# Altium PCB cree_mobicom.PcbDoc
Units mil, origin at the board's own origin, x right, y up, seen from the top; angles counter-clockwise.
Board outline 2400 x 2400 mil, 2 copper layers (Top Layer, Bottom Layer); 23 components, 18 nets, 73 pads, 51 vias.
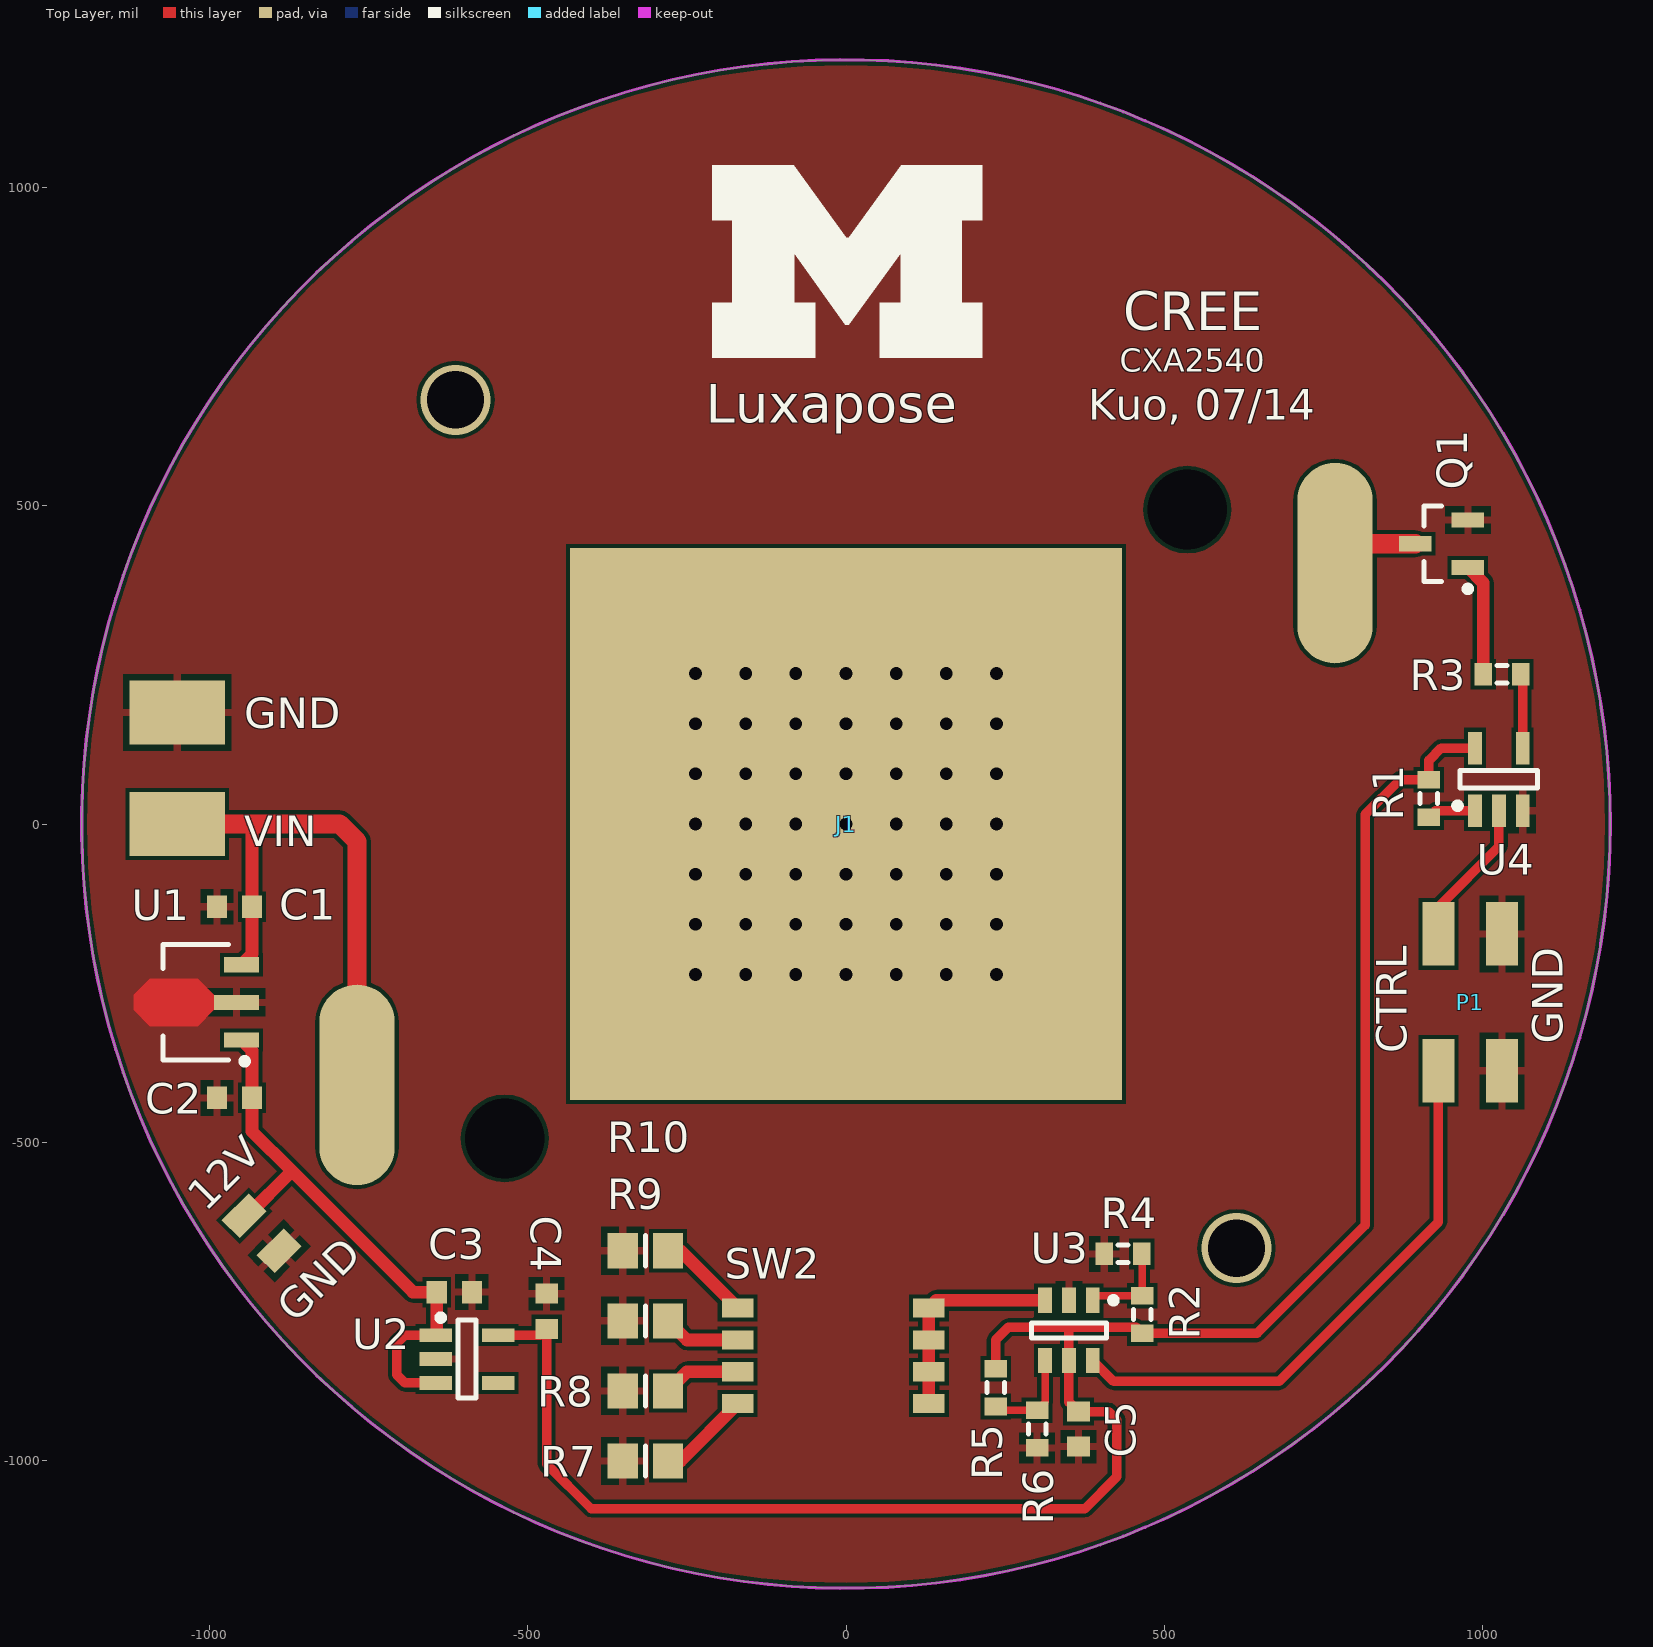
[diagram p0: Top Layer view]
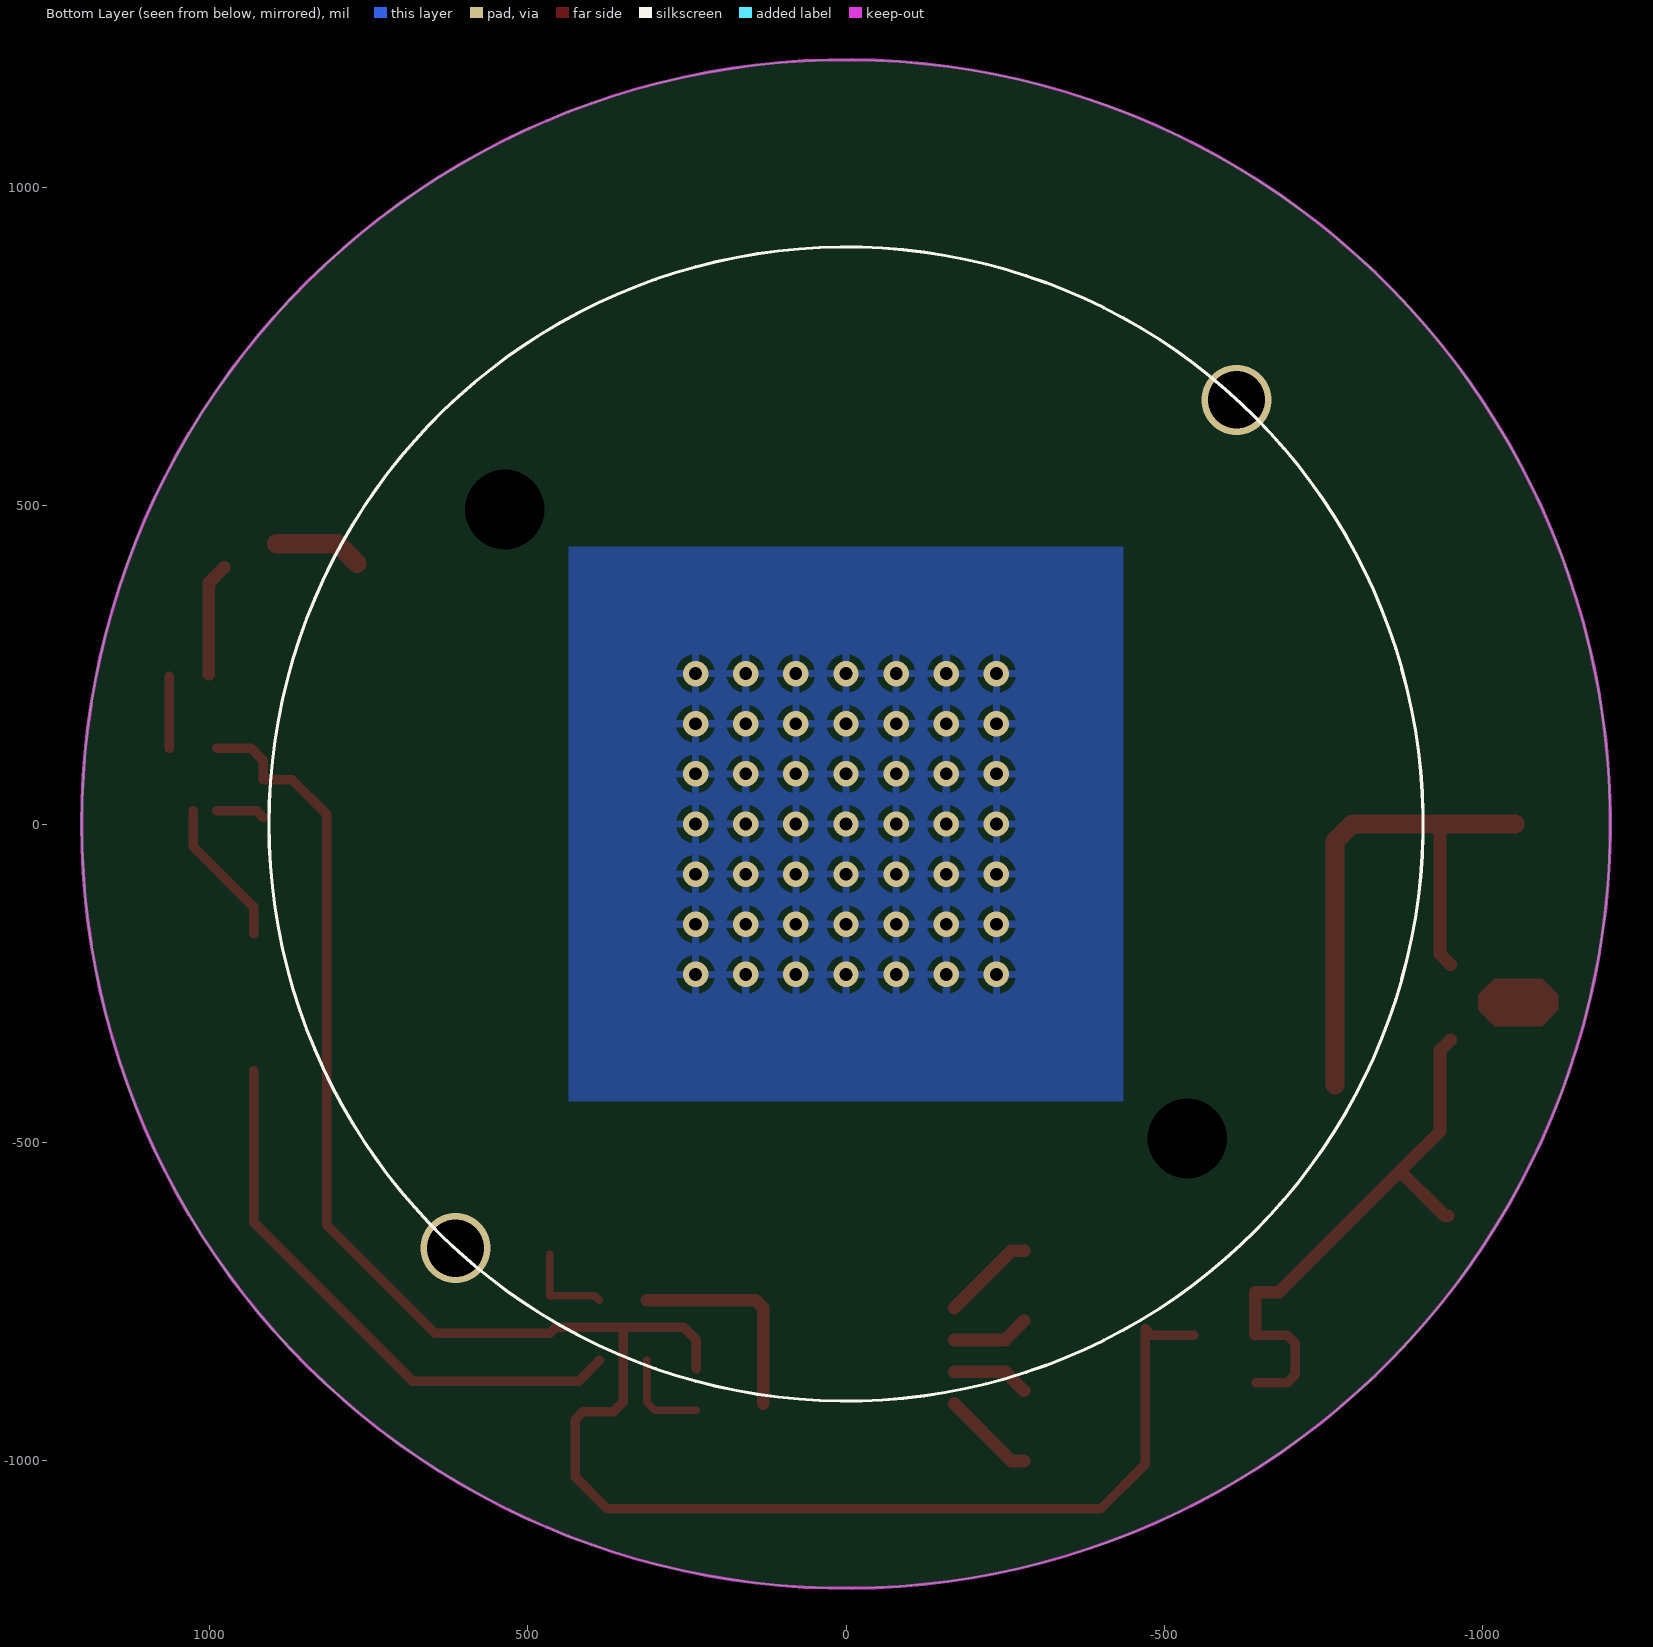
[diagram p1: Bottom Layer view, seen from below]

## Layer stack, top to bottom
Top Solder: solder mask 0.4, Solder Resist, Dk 3.5
Top Layer: signal copper 1.4
Dielectric 1: dielectric 12.6, FR-4, Dk 4.8
Bottom Layer: signal copper 1.4
Bottom Solder: solder mask 0.4, Solder Resist, Dk 3.5

## Board outline
0,-1200 cw(c0,0) -1200,0 cw(c0,0) 0,1200 cw(c0,0) 1200,0 cw(c0,0)

## Design rules (kind name [scope] priority, off if disabled: settings)
Clearance "Clearance~Sunstone Circuits" [All] p1: gap=6 // Sunstone Circuits Minimum Clearance Rule (Double Sided)
HoleSize "HoleSize~Sunstone Circuits" [All] p1: absolutevalues=TRUE maxlimit=251 minlimit=16 maxpercent=80.000 minpercent=20.000 // SSC Hole Size Rule For Single Sided & Double Sided Designs.
HoleSize Testpoint [All] p2: absolutevalues=TRUE maxlimit=100 minlimit=1 maxpercent=80.000 minpercent=20.000
HoleSize TestPointUsage [All] p3: absolutevalues=TRUE maxlimit=100 minlimit=1 maxpercent=80.000 minpercent=20.000
MinimumAnnularRing "MinimumAnnularRing~Sunstone Circuits" [All] p1: minimumring=7 // Sunstone Circuits Minimum Annular Ring (Double Sided)
PlaneClearance "PlaneClearance~Sunstone Circuits" [All] p1: clearance=12 // Sunstone Circuits Power Plane Clearance Rule (Double Sided)
PlaneConnect "PlaneConnect~Sunstone Circuits" [All] p1: planeconnectstyle=Relief reliefexpansion=10 reliefentries=4 reliefconductorwidth=8 reliefairgap=10 // Sunstone Circuits Power Plane Connect Rule (Double Sided)
PolygonConnect "PolygonConnect~Sunstone Circuits" [All] p1: connectstyle=Relief reliefconductorwidth=12 reliefentries=4 polygonreliefangle="90 Angle" airgapwidth=10 // Sunstone Circuits Polygon Connect Style (Double Sided)
RoomDefinition cree_module [InComponentClass('cree_module')] p1: confinementstyle=ConfineIn formatcopy=TRUE lockcomponents=FALSE outline -1139.25,-392.36 -1139.25,-168.62 -1019.21,-168.62 -1019.21,-96.38 -876.14,-96.38 -876.14,612.36 876.14,612.36 876.14,520.87 1023.74,520.87 1023.74,268.62 1089.21,268.62 1089.21,160.71 1101.93,160.71 1101.93,-20.71 1068,-20.71 1068,-450.48 876.14,-450.48 876.14,-612.36 568.62,-612.36 568.62,-769.21 498.62,-769.21 498.62,-829.21 439.72,-829.21 439.72,-883.74 398.62,-883.74 398.62,-1009.21 -234.13,-1009.21 -234.13,-1049.37 -395.87,-1049.37 -395.87,-916.93 -685.71,-916.93 -685.71,-612.36 -876.14,-612.36 -876.14,-463.62 -1019.21,-463.62 -1019.21,-392.36
RoutingVias "RoutingVias~Sunstone Circuits" [All] p1: holewidth=16 width=30 viastyle="Through Hole" minholewidth=16 minwidth=30 maxholewidth=20 maxwidth=40 // Sunstone Circuits Routing Vias Rule (Double Sided)
ShortCircuit "ShortCircuit~Sunstone Circuits" [All] p1: allowed=FALSE // Sunstone Circuits Short Circuit Rule~Do Not Allow (Double Sided)
SolderMaskExpansion "SolderMaskExpansion~Sunstone Circuits" [All] p1: expansion=3 // Sunstone Circuits Solder Mask Expansion Rule (Double Sided)
ViasUnderSMD "ViasUnderSMD~Sunstone Circuits" [All] p1: allowed=FALSE // Sunstone Circuits Vias Under SMD~Do Not Allow (Double Sided)
Width "Width~Sunstone Circuits" [All] p1: maxlimit=100 minlimit=6 preferedwidth=10 // Sunstone Circuits Minimum Width Rule (Double Sided)
25 further rules are at their usual default settings.

## Components (designator, comment, footprint, x,y, rotation, side; value= is the part's Value field where it differs from the comment)
C1 "Cap Semi" 1608[0603] -960,-130 r0 top
C2 "Cap Semi" 1608[0603] -960,-430 r0 top
C3 "Cap Semi" 1608[0603] -615,-735 r180 top
C4 "Cap Semi" 1608[0603] -470,-765 r270 top
C5 "Cap Semi" 1608[0603] 365,-950 r90 top
J1 "1807200002" MOLEX 0,0 r0 top
P1 "2 x 2 header SMD" "2x2 header SMD" 980,-280 r0 top
Q1 "Si2312CDS" SOT95P250-3N 935,440 r180 top
R1 "Res3" J1-0603 915,40 r90 top
R2 "Res3" J1-0603 465,-770 r270 top
R3 "Res3" J1-0603 1030,235 r0 top
R4 "Res3" J1-0603 435,-675 r0 top
R5 "Res3" J1-0603 235,-885 r90 top
R6 "Res3" J1-0603 300,-950 r90 top
R7 "Res3" 6-0805_N -315,-1000 r0 top
R8 "Res3" 6-0805_N -315,-890 r0 top
R9 "Res3" 6-0805_N -315,-780 r0 top
R10 "Res3" 6-0805_N -315,-670 r0 top
SW2 "CHS-04TB" CHS04TB -20,-835 r90 top
U1 "L78L" SOT89-150P409X160-3N -1020,-280 r180 top
U2 "LP2980" SOT23-5 -595,-840 r0 top
U3 "LTC6992" TSOT23-6 350,-795 r270 top
U4 "SN74LVC1G126" SOT23-5 1025,70 r90 top

## Footprints (in the part's own frame and the unit in brackets; to place one, negate y for a bottom-side part, rotate by r counter-clockwise, add the part's x,y. Pads: shape width x height; smd on the part's side, far side on the other; paste and mask are expansions set on the pad)
"2x2 header SMD" [mm] "100 mils header, SMD"
  rect 1.27x2.54 smd: 1(-1.27,-2.73) 2(-1.27,2.73) 3(1.27,-2.73) 4(1.27,2.73)
6-0805_N [mm] "Chip Resistor, Body 2.0x1.2mm, IPC Medium Density"
  rect 1.2x1.4 smd: 1(-0.9,0) 2(0.9,0)
  silkscreen extent 0,-0.6 0,0.6, body extent -1.07,-0.7 1.07,0.7, height 0.7
1608[0603] [mm] "Chip Capacitor, Body 1.6x0.8mm, IPC High Density"
  rect 0.8x0.9 smd: 1(-0.7,0) 2(0.7,0)
  body extent -0.87,-0.48 0.87,0.48, height 1.3
CHS04TB [mm] "4 POS DIP SWITCH"
  rect 0.76x1.27 smd: 1(-1.905,-3.81) 2(-1.905,3.81) 3(-0.635,-3.81) 4(-0.635,3.81) 5(0.635,-3.81) 6(0.635,3.81) 7(1.905,-3.81) 8(1.905,3.81)
J1-0603 [mm] "Chip Resistor, Body 1.6x0.8mm, IPC High Density"
  rect 0.7x0.9 smd: 1(-0.75,0) 2(0.75,0)
  silkscreen extent -0.2,-0.35 0.2,0.35, body extent -0.85,-0.48 0.85,0.48, height 0.9
MOLEX [mm] "CREE LED holder"
  oval 1.7x2.8 hole 3.175: 0(-13.61,-12.54) 0(13.61,12.54)
  rect 22x22 smd: 3(0,0)
  oval 3x8 smd: +(-19.5,-10.4) -(19.5,10.4)
  body extent -22,-15.3 22,15.3, height 4.5
SOT23-5 [mm] "SOT23, 5-Leads, Body 2.9x1.6mm, Pitch 0.95mm, Lead Span 2.8mm, IPC High Density"
  rect 1.3x0.55 smd: 1(-1.25,0.95) 2(-1.25,0) 3(-1.25,-0.95) 4(1.25,-0.95) 5(1.25,0.95)
  silkscreen extent -1.17,-1.55 0.35,1.77, body extent -0.67,-1.5 0.65,1.5, height 1.45
SOT89-150P409X160-3N [mm] "SOT89, 3-Leads, Body 4.50x2.45mm, Pitch 1.50mm, Lead Span 4.1mm, IPC Medium Density"
  rect 1.4x0.6 smd: 1(-1.8,1.5) 3(-1.8,-1.5)
  rect 1.8x0.6 smd: 2(-1.6,0)
  Top Layer region: -0.7,0.3 -0.05,0.95 1.85,0.95 2.5,0.3 2.5,-0.3 1.85,-0.95 -0.05,-0.95 -0.7,-0.3
  silkscreen extent -2.05,-2.3 1.32,2.47, body extent -1.28,-2.3 1.32,2.3, height 1.6
SOT95P250-3N [mm] "SOT23, 3-Leads, Body 2.9x1.3mm, Pitch 0.95mm, Lead Span 2.3mm, IPC Medium Density"
  rect 1.3x0.6 smd: 1(-1.05,0.95) 2(-1.05,-0.95) 3(1.05,0)
  silkscreen extent -1.18,-1.5 0.7,1.92, body extent -0.7,-1.5 0.7,1.5, height 1.2
TSOT23-6 [mm] "SOT23, 6-Leads, Body 3.0x2.9mm (max), Pitch 0.95mm, IPC Medium Density"
  rect 1x0.55 smd: 1(-1.2,0.95) 2(-1.2,0) 3(-1.2,-0.95) 4(1.2,-0.95) 5(1.2,0) 6(1.2,0.95)
  silkscreen extent -1.32,-1.5 0.3,1.9, body extent -0.87,-1.5 0.87,1.5, height 1

## Part data
C1 C2 C3 C4 C5: "Capacitor (Semiconductor SIM Model)"
J1: library part "Molex LED holder", "LED Array Holders  for CREE* XLamp†   Arrays"
P1: "2x2 100 mil header SMD"
Q1: "N-Channel 20 V (D-S) MOSFET"
R1 R2 R3 R4 R5 R6 R7 R8 R9 R10: "Resistor"
SW2: "SLIDE SWITCHES"
U1: "Positive voltage regulators"
U2: library part LP2980-N, "LP2980-N Micropower 50 mA Ultra Low-Dropout Regulator In SOT-23 Package"
U3: "TimerBlox: Voltage-Controlled Pulse   Width Modulator (PWM)"
U4: "Single Bus Buffer Gate With 3-State Output"

## Free pads (board coordinates)
  rect 150x100 smd: 1(-1050,0) 1(-1050,175)
  rect 60x40 smd rot 45: 2(-945,-615) 3(-890,-670)

## Via types
v1: diameter 40, hole 20, Top Layer to Bottom Layer, 49 vias
v2: diameter 110, hole 90, Top Layer to Bottom Layer, 2 vias

## Nets (pads, with @x,y where several pads share a name; then routed paths per layer and width w, separated by ;. In a path a pad name is that pad's centre, name@x,y a point inside that pad or via, vN(x,y) a via of type N, cw(c..) or ccw(c..) an arc to the next point about the centre after c; other vN are vias at no path point)
GND: C1.1 C2.1 C3.1 C4.1 C5.1 P1.3 P1.4 pad.1@-1050,175 pad.3 Q1.2 R4.1 R6.1 R7.1 R8.1 R9.1 R10.1 U1.2 U2.2 U3.2 U4.3
HEAT: J1.3
  other v1: -236.22,-236.22 -157.48,-236.22 -78.74,-236.22 0,-236.22 78.74,-236.22 157.48,-236.22 236.22,-236.22 -236.22,-157.48 -157.48,-157.48 -78.74,-157.48 0,-157.48 78.74,-157.48 157.48,-157.48 236.22,-157.48 -236.22,-78.74 -157.48,-78.74 -78.74,-78.74 0,-78.74 78.74,-78.74 157.48,-78.74 236.22,-78.74 -236.22,0 -157.48,0 -78.74,0 0,0 78.74,0 157.48,0 236.22,0 -236.22,78.74 -157.48,78.74 -78.74,78.74 0,78.74 78.74,78.74 157.48,78.74 236.22,78.74 -236.22,157.48 -157.48,157.48 -78.74,157.48 0,157.48 78.74,157.48 157.48,157.48 236.22,157.48 -236.22,236.22 -157.48,236.22 -78.74,236.22 0,236.22 78.74,236.22 157.48,236.22 236.22,236.22
NetJ1_-: J1.- Q1.3 | length 138.6
  Top Layer w30: J1.- 798.27,440 Q1.3
NetP1_1: P1.1 U3.6 | length 897.2
  Top Layer w15: U3.6 420.16,-875 680,-875 930,-625 P1.1
NetP1_2: P1.2 U4.2 | length 232.7
  Top Layer w15: P1.2 930,-130 1025,-35 U4.2
NetQ1_1: Q1.1 R3.1 | length 177.6
  Top Layer w20: Q1.1 1000.47,378.46 R3.1
NetR1_1: R1.1 U4.1 | length 76.9
  Top Layer w15: R1.1 925.31,20.79 U4.1
NetR2_1: R2.1 R4.2 U3.1 | length 145.6
  Top Layer w12: U3.1 394.68,-740.47 R2.1 R4.2@465,-675.47
NetR3_2: R3.2 U4.4 | length 112.9
  Top Layer w15: U4.4 R3.2@1062.4,232.13
NetR5_1: R5.1 R6.2 U3.4 | length 148.4
  Top Layer w12: R5.1@235,-920.47 R6.2 312.6,-907.87 U3.4
NetR7_2: R7.2 SW2.2 | length 146.8
  Top Layer w20: R7.2 -260,-1000 SW2.2
NetR8_2: R8.2 SW2.4 | length 122
  Top Layer w20: R8.2 -249.57,-860 SW2.4
NetR9_2: R9.2 SW2.6 | length 122
  Top Layer w20: R9.2 -249.57,-810 SW2.6
NetR10_2: R10.2 SW2.8 | length 146.8
  Top Layer w20: R10.2 -260,-670 SW2.8
NetSW2_1: SW2.1 SW2.3 SW2.5 SW2.7 U3.3 | length 337.7
  Top Layer w20: SW2.1 SW2.3 SW2.5 SW2.7 142.24,-747.76 U3.3
VCC5: C4.2 C5.2 R1.2 R2.2 R5.2 U2.5 U3.5 U4.5 | length 3112.5
  Top Layer w15: U2.5 -480.04,-802.6 C4.2 -470,-1005 -400,-1075 375,-1075 425,-1025 425,-935 412.44,-922.44 C5.2 350,-907.44 U3.5 350,-795 ; R5.2 235,-810 255,-790 455.47,-790 R2.2 645.47,-799.53 815,-630 815,15 869.53,69.53 R1.2 915,100 934.21,119.21 U4.5
VCC12: C2.2 C3.2 pad.2 U1.1 U2.1 U2.3 | length 896.7
  Top Layer w15: U2.3 -692.6,-877.4 -705,-865 -705,-815 -692.6,-802.6 U2.1
  Top Layer w20: U1.1 -932.44,-355.75 C2.2 -932.44,-482.56 -870,-545 ; pad.2 -940,-615 -870,-545 ; U2.1@-642.56,-800.94 C3.2 -680,-735 -870,-545
VIN: C1.2 J1.+ pad.1@-1050,0 U1.3 | length 904.6
  Top Layer w20: U1.3 -932.44,-204.25 C1.2 -932.44,-2.44 -930,0
  Top Layer w30: pad.1@-1050,0 -930,0 -795,0 -767.72,-27.28 J1.+
pads on no net: J1.0 U2.4
copper on no net:
  other v2: 613,-666 -613,666

## Polygon pours and split planes (outlines as drawn)
HEAT on Bottom Layer "Bottom Layer-No Net" (solid, pour order 5): -435,435 -435,-435 435,-435 435,435
GND on Top Layer "Bottom Layer-No Net" (solid, pour order 8): -1193.33,-4.41 ccw(c6.67,-4.41) 6.67,-1204.41 ccw(c6.67,-4.41) 1206.67,-4.41 ccw(c6.67,-4.41) 6.67,1195.59 ccw(c6.67,-4.41)

## Keep-outs
Keep-Out Layer:
  circle w5: c0,0 r1200

## Silkscreen, mask and mechanical layers (free items; w line width, h text height)
Top Overlay:
  region: -209.73,731.96 -48.34,731.96 -48.34,818.12 -81.17,818.12 -81.17,896.07 -1.16,783.93 4.31,783.93 85.69,896.07 85.69,818.12 52.86,818.12 52.86,731.96 214.25,731.96 214.25,818.12 181.42,818.12 181.42,948.05 214.25,948.05 214.25,1034.21 86.37,1034.21 4.31,920.69 0.21,920.69 -81.85,1034.21 -209.73,1034.21 -209.73,948.05 -178.27,948.05 -178.27,818.12 -209.73,818.12
  text "CREE" at 435,775 h60
  text "CXA2540" at 430,710 h36
  text "Kuo, 07/14" at 380,635 h48
  text "Luxapose" at -220,630 h60
  text "GND" at -945,150 h48
  text "VIN" at -945,-35 h48
  text "GND" at 1125,-345 h48 r90
  text "CTRL" at 880,-360 h48 r90
  text "12V" at -1005,-610 h48 r45
  text "GND" at -865,-785 h48 r45
Bottom Overlay:
  circle w5: c0,0 r906
Bottom Solder:
  rectangle: -435,-435 435,435